# EAGLE board 3D-Druck-Platine (EAGLE 7.4.0)
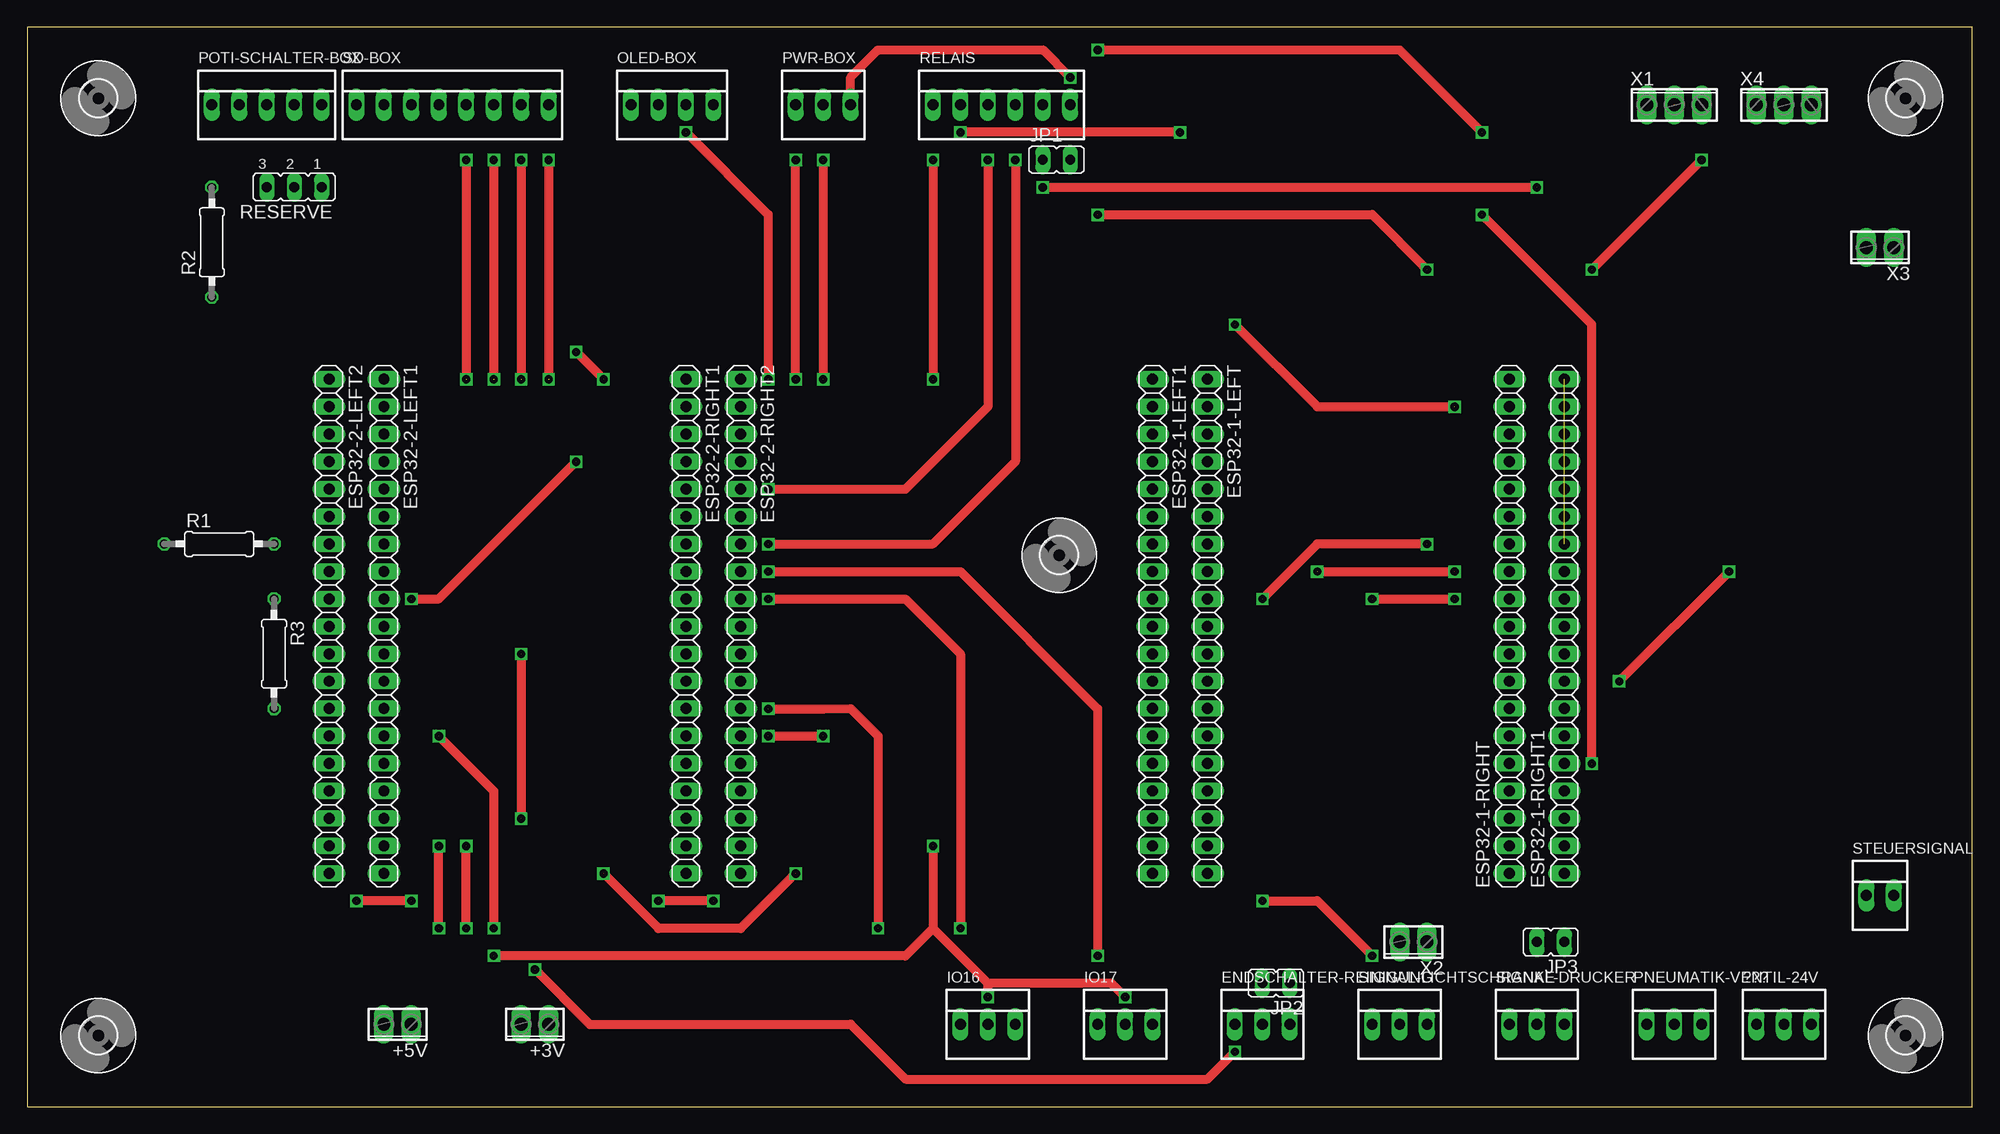
[diagram p0: board, top side]
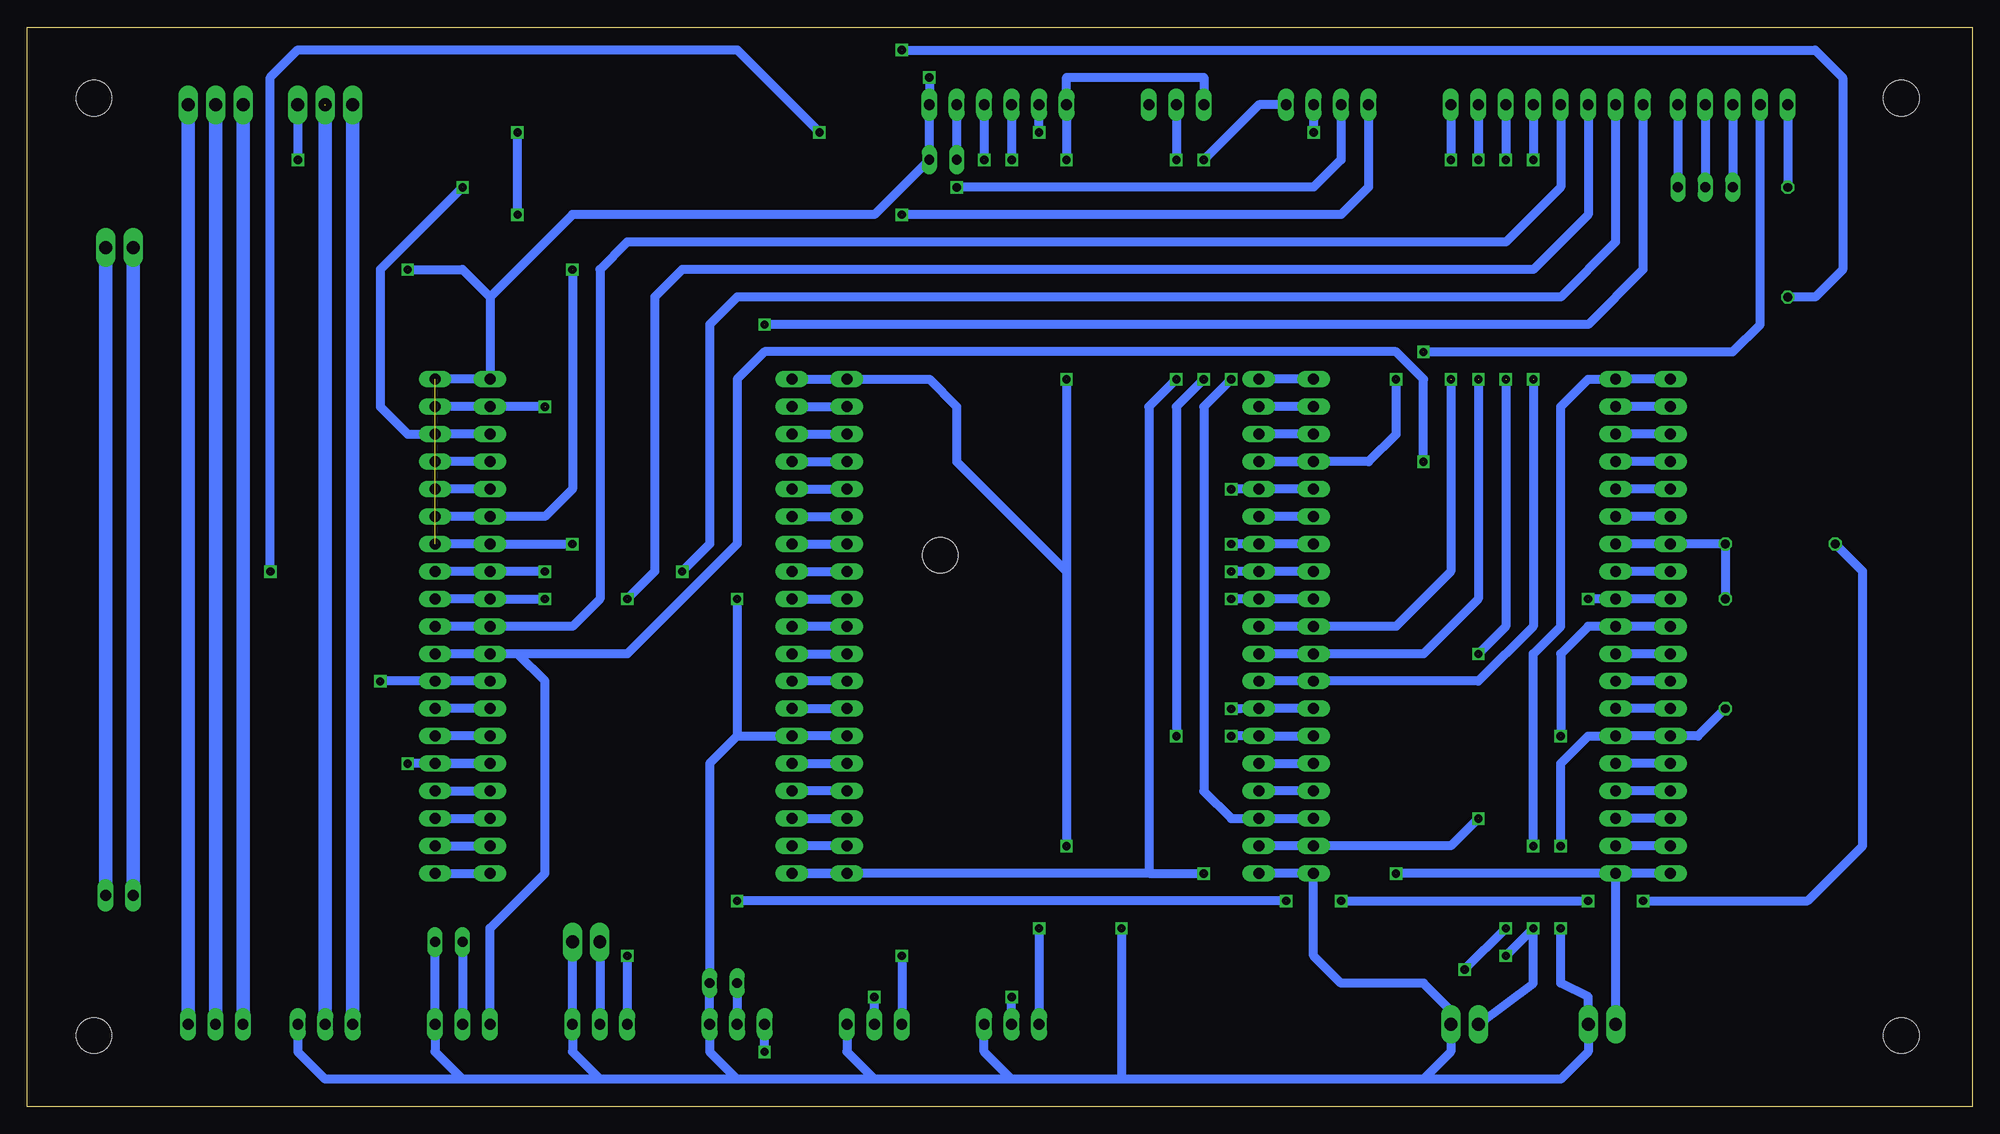
[diagram p1: board, bottom side, seen from below]

Size 180 x 99.92 mm. Coordinates in mm from the lower left corner, seen from the top.
Outline: 0,0 180,0 180,99.92 0,99.92 0,0
Copper layers 16: Bottom 0.035mm
Design rules "Multi-CB_1L_100µm-Tracks_OL35µm": minimum track width 0.1mm, minimum drill 0.2mm, track to track 0.1mm, track to pad 0.1mm, pad to pad 0.1mm, via to via 0.1mm, smd to smd 0mil, copper to edge 0.2mm, drill to drill 0.2mm, minimum pad ring 0.125mm, minimum via ring 0.1mm, stop-mask expansion 2mil, vias tented up to drill 0.45mm, thermal gap 0.2mm

## Footprints (pad centres in the part's own frame; a part is rotated, then mirrored left to right if it is on the bottom)
2POL254 = drill 1.2 long: 1 -1.27,0; 2 1.27,0
22-23-2031 = drill 1 long: 1 -2.54,0; 2 0,0; 3 2.54,0
1X19 = drill 1.016 long: 1 -22.86,0; 2 -20.32,0; 3 -17.78,0; 4 -15.24,0; 5 -12.7,0; 6 -10.16,0; 7 -7.62,0; 8 -5.08,0; 9 -2.54,0; 10 0,0; 11 2.54,0; 12 5.08,0; 13 7.62,0; 14 10.16,0; 15 12.7,0; 16 15.24,0; 17 17.78,0; 18 20.32,0; 19 22.86,0
JP1 = drill 0.914 long: 1 0,-1.27; 2 0,1.27
22-23-2041 = drill 1 long: 1 -3.81,0; 2 -1.27,0; 3 1.27,0; 4 3.81,0
22-23-2051 = drill 1 long: 1 -5.08,0; 2 -2.54,0; 3 0,0; 4 2.54,0; 5 5.08,0
0207/10 = drill 0.813 octagon: 1 -5.08,0; 2 5.08,0
22-23-2061 = drill 1 long: 1 -6.35,0; 2 -3.81,0; 3 -1.27,0; 4 1.27,0; 5 3.81,0; 6 6.35,0
JP2 = drill 0.914 long: 1 -2.54,0; 2 0,0; 3 2.54,0
22-23-2081 = drill 1 long: 1 -8.89,0; 2 -6.35,0; 3 -3.81,0; 4 -1.27,0; 5 1.27,0; 6 3.81,0; 7 6.35,0; 8 8.89,0
22-23-2021 = drill 1 long: 1 -1.27,0; 2 1.27,0
3,3 = hole 3.3: 0,0
3POL254 = drill 1.2 long: 1 -2.54,0; 2 0,0; 3 2.54,0

## Placement (x,y rotation side)
+3V  +3V  [2POL254]  46.99,7.64 180 top
+5V  +5V  [2POL254]  34.29,7.64 180 top
???  22-23-2031  [22-23-2031]  162.56,7.64 0 top
ENDSCHALTER-REINIGUNG  22-23-2031  [22-23-2031]  114.3,7.64 0 top
ESP32-1-LEFT  ES32-1-Left  [1X19]  109.22,44.47 270 top
ESP32-1-LEFT1  ES32-1-Left  [1X19]  104.14,44.47 270 top
ESP32-1-RIGHT  ESP32-1-Right  [1X19]  137.16,44.47 90 top
ESP32-1-RIGHT1  ESP32-1-Right  [1X19]  142.24,44.47 90 top
ESP32-2-LEFT1  ESP-2-Left  [1X19]  33.02,44.47 270 top
ESP32-2-LEFT2  ESP-2-Left  [1X19]  27.94,44.47 270 top
ESP32-2-RIGHT1  ESP32-2-Right  [1X19]  60.96,44.47 270 top
ESP32-2-RIGHT2  ESP32-2-Right  [1X19]  66.04,44.47 270 top
IO16  22-23-2031  [22-23-2031]  88.9,7.64 0 top
IO17  22-23-2031  [22-23-2031]  101.6,7.64 0 top
JP1  Reserve-Relais  [JP1]  95.25,87.65 270 top
JP2  Reserve Endschalter  [JP1]  115.57,11.45 90 top
JP3  Reserver-Drucker  [JP1]  140.97,15.26 90 top
OLED-BOX  22-23-2041  [22-23-2041]  59.69,92.73 0 top
PNEUMATIK-VENTIL-24V  22-23-2031  [22-23-2031]  152.4,7.64 0 top
POTI-SCHALTER-BOX  22-23-2051  [22-23-2051]  22.18,92.73 0 top
PWR-BOX  22-23-2031  [22-23-2031]  73.66,92.73 0 top
R1  1  [0207/10]  17.78,52.09 0 top
R2  100  [0207/10]  17.1,80.01 90 top
R3  1  [0207/10]  22.86,41.93 270 top
RELAIS  22-23-2061  [22-23-2061]  90.17,92.73 0 top
RESERVE  Reserve-Poti/Schalter  [JP2]  24.72,85.11 180 top
SD-BOX  22-23-2081  [22-23-2081]  39.37,92.73 0 top
SIGNAL-DRUCKER  22-23-2031  [22-23-2031]  139.7,7.64 0 top
SIGNAL-LICHTSCHRANKE  22-23-2031  [22-23-2031]  127,7.64 0 top
STEUERSIGNAL  22-23-2021  [22-23-2021]  171.45,19.57 0 top
U$1  [3,3]  6.6,6.6 0 top
U$2  [3,3]  6.6,93.33 0 top
U$3  [3,3]  173.8,93.33 0 top
U$4  [3,3]  173.8,6.6 0 top
U$5  [3,3]  95.5,51.05 0 top
X1  Pneumatik Ventil  [3POL254]  152.4,92.73 0 top
X2  Lichtschranke  [2POL254]  128.27,15.26 180 top
X3  Steuersignal  [2POL254]  171.45,79.53 180 top
X4  ??  [3POL254]  162.56,92.73 0 top

## Library data of the parts
+3V +5V X1-X4 = con-phoenix-254; OC_FARNELL: unknown; OC_NEWARK: unknown
??? ENDSCHALTER-REINIGUNG IO16 IO17 PNEUMATIK-VENTIL-24V PWR-BOX SIGNAL-DRUCKER SIGNAL-LICHTSCHRANKE = con-molex; MF: MOLEX; MPN: 22-23-2031; OC_FARNELL: 1462950; OC_NEWARK: 30C0862
ESP32-1-LEFT ESP32-1-LEFT1 ESP32-1-RIGHT ESP32-1-RIGHT1 ESP32-2-LEFT1 ESP32-2-LEFT2 ESP32-2-RIGHT1 ESP32-2-RIGHT2 = pinhead
JP1-JP3 RESERVE = jumper
OLED-BOX = con-molex; MF: MOLEX; MPN: 22-23-2041; OC_FARNELL: 1462920; OC_NEWARK: 38C0355
POTI-SCHALTER-BOX = con-molex; MF: MOLEX; MPN: 22-23-2051; OC_FARNELL: 1462952; OC_NEWARK: 38C9178
R1-R3 = rcl
RELAIS = con-molex; MF: MOLEX; MPN: 22-23-2061; OC_FARNELL: 1462922; OC_NEWARK: 27C1933
SD-BOX = con-molex; MF: MOLEX; MPN: 22-23-2081; OC_FARNELL: 1756826; OC_NEWARK: 01C7592
STEUERSIGNAL = con-molex; MF: MOLEX; MPN: 22-23-2021; OC_FARNELL: 1462926; OC_NEWARK: 25C3832
U$1-U$5 = holes

## Nets
GND: +3V.1 +5V.1 ENDSCHALTER-REINIGUNG.3 ESP32-1-LEFT1.14 ESP32-1-LEFT.14 ESP32-1-RIGHT1.13 ESP32-1-RIGHT1.19 ESP32-1-RIGHT.13 ESP32-1-RIGHT.19 ESP32-2-LEFT1.14 ESP32-2-LEFT2.14 ESP32-2-RIGHT1.13 ESP32-2-RIGHT1.19 ESP32-2-RIGHT2.13 ESP32-2-RIGHT2.19 IO16.3 IO17.3 JP1.2 JP2.1 JP3.1 PNEUMATIK-VENTIL-24V.3 PWR-BOX.3 R3.2 RELAIS.6 SIGNAL-DRUCKER.3 SIGNAL-LICHTSCHRANKE.3 X1.3 X2.1
N$1: ESP32-1-LEFT1.2 ESP32-1-LEFT.2
N$2: POTI-SCHALTER-BOX.3 RESERVE.3
N$3: ESP32-1-LEFT1.3 ESP32-1-LEFT.3
N$3V: +3V.2 ESP32-1-LEFT1.1 ESP32-1-LEFT.1 ESP32-2-LEFT1.1 ESP32-2-LEFT2.1 IO16.2 IO17.2 PWR-BOX.1 RELAIS.1
N$4: POTI-SCHALTER-BOX.4 RESERVE.2
N$5: POTI-SCHALTER-BOX.5 RESERVE.1
N$5V: +5V.2 ESP32-1-LEFT1.19 ESP32-1-LEFT.19 ESP32-2-LEFT1.19 ESP32-2-LEFT2.19 PWR-BOX.2
N$6: ESP32-1-LEFT1.4 ESP32-1-LEFT.4
N$7: ESP32-1-LEFT1.5 ESP32-1-LEFT.5
N$8: ENDSCHALTER-REINIGUNG.2 JP2.2
N$9: ESP32-1-LEFT1.6 ESP32-1-LEFT.6
N$10: JP3.2 SIGNAL-DRUCKER.2
N$11: R1.1 SIGNAL-LICHTSCHRANKE.1
N$12: SIGNAL-LICHTSCHRANKE.2 X2.2
N$13: PNEUMATIK-VENTIL-24V.1 X1.1
N$14: STEUERSIGNAL.1 X3.2
N$15: STEUERSIGNAL.2 X3.1
N$16: PNEUMATIK-VENTIL-24V.2 X1.2
N$17: ???.1 X4.1
N$18: ???.2 X4.2
N$19: ???.3 X4.3
N$20: JP1.1 RELAIS.5
N$21: ESP32-1-LEFT1.7 ESP32-1-LEFT.7
N$22: ESP32-1-LEFT1.8 ESP32-1-LEFT.8
N$23: ESP32-1-LEFT1.9 ESP32-1-LEFT.9
N$24: ESP32-1-LEFT1.10 ESP32-1-LEFT.10
N$25: ESP32-1-LEFT1.11 ESP32-1-LEFT.11
N$26: ESP32-1-LEFT1.12 ESP32-1-LEFT.12
N$27: ESP32-1-LEFT1.13 ESP32-1-LEFT.13
N$28: ESP32-1-LEFT1.15 ESP32-1-LEFT.15
N$29: ESP32-1-LEFT1.16 ESP32-1-LEFT.16
N$30: ESP32-1-LEFT1.17 ESP32-1-LEFT.17
N$31: ESP32-1-LEFT1.18 ESP32-1-LEFT.18
N$32: ESP32-1-RIGHT1.1 ESP32-1-RIGHT.1
N$33: ESP32-1-RIGHT1.2 ESP32-1-RIGHT.2
N$34: ESP32-1-RIGHT1.3 ESP32-1-RIGHT.3
N$35: ESP32-1-RIGHT1.4 ESP32-1-RIGHT.4
N$37: ESP32-1-RIGHT1.7 ESP32-1-RIGHT.7
N$38: ESP32-1-RIGHT1.15 ESP32-1-RIGHT.15
N$39: ESP32-1-RIGHT1.16 ESP32-1-RIGHT.16
N$40: ESP32-2-LEFT1.2 ESP32-2-LEFT2.2
N$41: ESP32-2-LEFT1.3 ESP32-2-LEFT2.3
N$42: ESP32-2-LEFT1.4 ESP32-2-LEFT2.4
N$43: ESP32-2-LEFT1.5 ESP32-2-LEFT2.5
N$44: ESP32-2-LEFT1.6 ESP32-2-LEFT2.6
N$45: ESP32-2-LEFT1.8 ESP32-2-LEFT2.8
N$46: ESP32-2-LEFT1.11 ESP32-2-LEFT2.11
N$47: ESP32-2-LEFT1.12 ESP32-2-LEFT2.12
N$48: ESP32-2-LEFT1.13 ESP32-2-LEFT2.13
N$49: ESP32-2-LEFT1.15 ESP32-2-LEFT2.15
N$50: ESP32-2-LEFT1.16 ESP32-2-LEFT2.16
N$51: ESP32-2-LEFT1.17 ESP32-2-LEFT2.17
N$52: ESP32-2-LEFT1.18 ESP32-2-LEFT2.18
N$53: ESP32-2-RIGHT1.1 ESP32-2-RIGHT2.1
N$54: ESP32-2-RIGHT1.2 ESP32-2-RIGHT2.2
N$55: ESP32-2-RIGHT1.3 ESP32-2-RIGHT2.3
N$57: ESP32-2-RIGHT1.6 ESP32-2-RIGHT2.6
N$58: ESP32-2-RIGHT1.15 ESP32-2-RIGHT2.15
N$59: POTI-SCHALTER-BOX.1 R2.2
N$60: ESP32-1-RIGHT1.6 ESP32-1-RIGHT.6
N$101: ESP32-2-RIGHT1.16 ESP32-2-RIGHT2.16
N$ESP1-18: ESP32-1-RIGHT1.11 ESP32-1-RIGHT.11 SD-BOX.3
N$ESP1-IO2: ESP32-1-RIGHT1.5 ESP32-1-RIGHT.5 R2.1
N$ESP1-IO5: ESP32-1-RIGHT1.10 ESP32-1-RIGHT.10 SD-BOX.4
N$ESP1-IO16: ESP32-1-RIGHT1.8 ESP32-1-RIGHT.8 RELAIS.2
N$ESP1-IO17_ESP2-IO25: ESP32-1-RIGHT1.9 ESP32-1-RIGHT.9 ESP32-2-LEFT1.9 ESP32-2-LEFT2.9 SIGNAL-DRUCKER.1
N$ESP1-IO19: ESP32-1-RIGHT1.12 ESP32-1-RIGHT.12 SD-BOX.2
N$ESP1-IO21: ESP32-1-RIGHT1.14 ESP32-1-RIGHT.14 OLED-BOX.1
N$ESP1-IO22: ESP32-1-RIGHT1.17 ESP32-1-RIGHT.17 OLED-BOX.2
N$ESP1-IO23: ESP32-1-RIGHT1.18 ESP32-1-RIGHT.18 SD-BOX.1
N$ESP2-IO2: ESP32-2-RIGHT1.5 ESP32-2-RIGHT2.5 RELAIS.3
N$ESP2-IO4: ESP32-2-RIGHT1.7 ESP32-2-RIGHT2.7 RELAIS.4
N$ESP2-IO5: ESP32-2-RIGHT1.10 ESP32-2-RIGHT2.10 SD-BOX.8
N$ESP2-IO15: ESP32-2-RIGHT1.4 ESP32-2-RIGHT2.4 POTI-SCHALTER-BOX.2
N$ESP2-IO16: ESP32-2-RIGHT1.8 ESP32-2-RIGHT2.8 IO17.1
N$ESP2-IO17: ESP32-2-RIGHT1.9 ESP32-2-RIGHT2.9 IO16.1
N$ESP2-IO18: ESP32-2-RIGHT1.11 ESP32-2-RIGHT2.11 SD-BOX.7
N$ESP2-IO19: ESP32-2-RIGHT1.12 ESP32-2-RIGHT2.12 SD-BOX.5
N$ESP2-IO21: ESP32-2-RIGHT1.14 ESP32-2-RIGHT2.14 OLED-BOX.4
N$ESP2-IO22: ESP32-2-RIGHT1.17 ESP32-2-RIGHT2.17 OLED-BOX.3
N$ESP2-IO23: ESP32-2-RIGHT1.18 ESP32-2-RIGHT2.18 SD-BOX.6
N$ESP2-IO26: ENDSCHALTER-REINIGUNG.1 ESP32-2-LEFT1.10 ESP32-2-LEFT2.10
N$ESP2-IO32: ESP32-2-LEFT1.7 ESP32-2-LEFT2.7 R1.2 R3.1

## Tracks (layer width: path | path; a pad name or v marks a point on that pad's centre or on a via)
GND  (14 unrouted)
  Top 0.813: 154.94,87.65 144.78,77.49 | 38.1,16.53 38.1,24.15 | 78.74,16.53 78.74,34.31 76.2,36.85 arc-2 68.58,36.83 | PWR-BOX.3 76.2,95.27 78.74,97.81 93.98,97.81 96.52,95.27 | 129.54,52.09 119.38,52.09 114.3,47.01
  Bottom 0.813: 137.16,74.95 ESP32-1-RIGHT.19 ESP32-1-RIGHT1.19 | JP3.1 SIGNAL-DRUCKER.3 142.24,5.1 139.7,2.56 | X1.3 154.94,87.65 | PNEUMATIK-VENTIL-24V.3 154.94,5.1 152.4,2.56 139.7,2.56 | X2.1 SIGNAL-LICHTSCHRANKE.3 129.54,5.1 127,2.56 | 50.8,2.56 48.26,5.1 +3V.1 48.26,8.89 50.8,11.43 50.8,11.45 58.42,11.45 60.96,13.99 ESP32-2-RIGHT1.19 ESP32-2-RIGHT2.19 | 50.8,2.56 78.74,2.56 | 88.9,2.56 101.6,2.56 | 101.6,2.56 114.3,2.56 | 114.3,2.56 127,2.56 | 127,2.56 139.7,2.56 | 50.8,2.56 38.1,2.56 35.56,5.1 +5V.1 35.56,10.18 38.1,11.45 38.1,16.53 | 114.3,34.31 116.84,31.77 JP2.1 ENDSCHALTER-REINIGUNG.3 116.84,5.1 114.3,2.56 | 114.3,34.31 ESP32-1-LEFT.14 ESP32-1-LEFT1.14 | R3.2 25.4,34.31 ESP32-2-LEFT2.14 ESP32-2-LEFT1.14 35.56,34.31 38.1,31.77 38.1,24.15 | 78.74,16.53 78.74,2.56 | 96.52,95.27 RELAIS.6 JP1.2 101.6,82.57 129.54,82.57 137.16,74.95 | 144.78,77.49 139.7,77.49 137.16,74.95 | IO17.3 104.14,5.1 101.6,2.56 | 78.74,2.56 88.9,2.56 | 88.9,2.56 91.44,5.1 IO16.3 | ESP32-1-RIGHT1.13 ESP32-1-RIGHT.13 129.54,52.09 | 114.3,47.01 114.3,34.31 | ESP32-2-RIGHT1.13 ESP32-2-RIGHT2.13 arc-1 68.58,36.83
N$1
  Bottom 0.813: ESP32-1-LEFT.2 ESP32-1-LEFT1.2
N$2
  Bottom 0.813: POTI-SCHALTER-BOX.3 RESERVE.3
N$3
  Bottom 0.813: ESP32-1-LEFT.3 ESP32-1-LEFT1.3 104.14,62.23
N$3V  (13 unrouted)
  Top 0.813: 83.82,87.65 83.82,67.33 | 40.64,16.53 40.64,24.15 | 83.82,24.15 83.82,16.53 | 88.9,10.16 88.9,11.43 | 88.9,11.43 88.9,11.45 83.82,16.53 | 101.6,10.18 101.58,10.18 100.33,11.43 88.9,11.43 | 83.82,16.53 83.82,16.51 81.28,13.97 43.2,13.97 43.18,13.99
  Bottom 0.813: PWR-BOX.1 71.12,95.27 83.82,95.27 RELAIS.1 83.82,87.65 | +3V.2 40.64,11.45 40.64,16.53 43.18,13.99 | 40.64,24.15 40.64,41.93 38.1,44.47 38.1,64.79 35.56,67.33 ESP32-2-LEFT1.1 ESP32-2-LEFT2.1 | 83.82,49.55 93.98,59.71 93.98,64.79 96.52,67.33 ESP32-1-LEFT1.1 ESP32-1-LEFT.1 | 83.82,49.55 83.82,24.15 | 83.82,67.33 83.82,49.55 | IO16.2 88.9,10.18 | IO17.2 101.6,10.18
N$4
  Bottom 0.813: POTI-SCHALTER-BOX.4 RESERVE.2
N$5
  Bottom 0.813: POTI-SCHALTER-BOX.5 RESERVE.1
N$5V  (6 unrouted)
  Top 0.813: 73.66,87.65 73.66,67.33 | 53.34,21.61 58.42,16.53 58.42,16.51 66.04,16.51 71.12,21.59
  Bottom 0.813: PWR-BOX.2 73.66,87.65 | 76.2,21.61 ESP32-1-LEFT.19 ESP32-1-LEFT1.19 104.14,21.59 | ESP32-2-LEFT1.19 +5V.2 | ESP32-2-LEFT1.19 53.34,21.61 | 73.66,67.33 76.2,64.79 76.2,21.61 | ESP32-2-LEFT2.19 ESP32-2-LEFT1.19 | 76.2,21.61 71.14,21.61 71.12,21.59
N$6
  Bottom 0.813: ESP32-1-LEFT.4 ESP32-1-LEFT1.4 104.14,59.69
N$7
  Bottom 0.813: ESP32-1-LEFT.5 ESP32-1-LEFT1.5
N$8
  Bottom 0.813: JP2.2 ENDSCHALTER-REINIGUNG.2
N$9
  Bottom 0.813: ESP32-1-LEFT.6 ESP32-1-LEFT1.6
N$10
  Bottom 0.813: JP3.2 SIGNAL-DRUCKER.2
N$11  (6 unrouted)
  Top 0.813: 63.5,19.07 58.42,19.07 | 35.56,19.07 30.48,19.07 | 114.3,19.07 119.38,19.07 124.46,13.99
  Bottom 0.813: 58.42,19.07 35.56,19.07 | 30.48,19.07 15.24,19.07 10.16,24.15 10.16,49.55 R1.1 | 63.5,19.07 114.3,19.07 | 124.46,13.99 SIGNAL-LICHTSCHRANKE.1
N$12
  Bottom 0.813: X2.2 SIGNAL-LICHTSCHRANKE.2
N$13
  Bottom 1.27: X1.1 PNEUMATIK-VENTIL-24V.1
N$14
  Bottom 1.27: X3.2 STEUERSIGNAL.1
N$15
  Bottom 1.27: X3.1 STEUERSIGNAL.2
N$16  (1 unrouted)
  Bottom 1.27: PNEUMATIK-VENTIL-24V.2 152.4,92.71
N$17
  Bottom 1.27: X4.1 ???.1
N$18
  Bottom 1.27: ???.2 X4.2
N$19
  Bottom 1.27: X4.3 ???.3
N$20
  Bottom 0.813: RELAIS.5 JP1.1
N$21
  Bottom 0.813: ESP32-1-LEFT.7 ESP32-1-LEFT1.7
N$22
  Bottom 0.813: ESP32-1-LEFT.8 ESP32-1-LEFT1.8 104.14,49.53
N$23
  Bottom 0.813: ESP32-1-LEFT.9 ESP32-1-LEFT1.9
N$24
  Bottom 0.813: ESP32-1-LEFT1.10 ESP32-1-LEFT.10
N$25
  Bottom 0.813: ESP32-1-LEFT.11 ESP32-1-LEFT1.11 104.14,41.91
N$26
  Bottom 0.813: ESP32-1-LEFT1.12 ESP32-1-LEFT.12
N$27
  Bottom 0.813: ESP32-1-LEFT.13 ESP32-1-LEFT1.13
N$28
  Bottom 0.813: ESP32-1-LEFT.15 ESP32-1-LEFT1.15 104.14,31.75
N$29
  Bottom 0.813: ESP32-1-LEFT1.16 ESP32-1-LEFT.16
N$30
  Bottom 0.813: ESP32-1-LEFT.17 ESP32-1-LEFT1.17 104.14,26.67
N$31
  Bottom 0.813: ESP32-1-LEFT1.18 ESP32-1-LEFT.18
N$32
  Bottom 0.813: ESP32-1-RIGHT1.1 ESP32-1-RIGHT.1
N$33
  Bottom 0.813: ESP32-1-RIGHT1.2 ESP32-1-RIGHT.2
N$34
  Bottom 0.813: ESP32-1-RIGHT1.3 ESP32-1-RIGHT.3
N$35
  Bottom 0.813: ESP32-1-RIGHT1.4 ESP32-1-RIGHT.4
N$37
  Bottom 0.813: ESP32-1-RIGHT.7 ESP32-1-RIGHT1.7
N$38
  Bottom 0.813: ESP32-1-RIGHT.15 ESP32-1-RIGHT1.15
N$39
  Bottom 0.813: ESP32-1-RIGHT.16 ESP32-1-RIGHT1.16
N$40
  Bottom 0.813: ESP32-2-LEFT2.2 ESP32-2-LEFT1.2
N$41
  Bottom 0.813: ESP32-2-LEFT2.3 ESP32-2-LEFT1.3
N$42
  Bottom 0.813: ESP32-2-LEFT2.4 ESP32-2-LEFT1.4
N$43
  Bottom 0.813: ESP32-2-LEFT2.5 ESP32-2-LEFT1.5
N$44
  Bottom 0.813: ESP32-2-LEFT2.6 ESP32-2-LEFT1.6
N$45
  Bottom 0.813: ESP32-2-LEFT2.8 ESP32-2-LEFT1.8
N$46
  Bottom 0.813: ESP32-2-LEFT2.11 ESP32-2-LEFT1.11
N$47
  Bottom 0.813: ESP32-2-LEFT2.12 ESP32-2-LEFT1.12
N$48
  Bottom 0.813: ESP32-2-LEFT2.13 ESP32-2-LEFT1.13
N$49
  Bottom 0.813: ESP32-2-LEFT2.15 ESP32-2-LEFT1.15
N$50
  Bottom 0.813: ESP32-2-LEFT2.16 ESP32-2-LEFT1.16
N$51
  Bottom 0.813: ESP32-2-LEFT2.17 ESP32-2-LEFT1.17
N$52
  Bottom 0.813: ESP32-2-LEFT2.18 ESP32-2-LEFT1.18
N$53
  Bottom 0.813: ESP32-2-RIGHT1.1 ESP32-2-RIGHT2.1
N$54
  Bottom 0.813: ESP32-2-RIGHT1.2 ESP32-2-RIGHT2.2
N$55
  Bottom 0.813: ESP32-2-RIGHT1.3 ESP32-2-RIGHT2.3
N$57
  Bottom 0.813: ESP32-2-RIGHT1.6 ESP32-2-RIGHT2.6
N$58
  Bottom 0.813: ESP32-2-RIGHT2.15 ESP32-2-RIGHT1.15
N$59
  Bottom 0.813: POTI-SCHALTER-BOX.1 R2.2
N$60
  Bottom 0.813: ESP32-1-RIGHT.6 ESP32-1-RIGHT1.6
N$67  (via drill 0.76)
  other vias: 93.98,85.09
N$68  (1 unrouted)
N$74  (1 unrouted)
N$75  (1 unrouted)
N$76  (1 unrouted)
N$77  (1 unrouted)
N$78  (1 unrouted)
N$79  (1 unrouted)
N$100  (1 unrouted)
N$101
  Bottom 0.813: ESP32-2-RIGHT1.16 ESP32-2-RIGHT2.16
N$ESP1-18  (3 unrouted)
  Top 0.813: 124.46,47.01 132.08,47.01
  Bottom 0.813: SD-BOX.3 35.56,82.57 40.64,77.49 119.38,77.49 121.92,74.95 121.92,49.55 124.46,47.01 | ESP32-1-RIGHT1.11 ESP32-1-RIGHT.11 132.08,47.01
N$ESP1-IO2  (4 unrouted)
  Top 0.813: 144.78,31.75 144.78,72.39 134.62,82.55 | 134.62,90.17 127,97.79 99.06,97.79
  Bottom 0.813: 144.78,31.75 144.76,31.77 ESP32-1-RIGHT1.5 142.22,31.75 | 134.62,82.55 134.62,90.17 | 99.06,97.79 14.56,97.79 12.02,95.25 12.02,77.47 14.56,74.93 R2.1 | ESP32-1-RIGHT.5 142.22,31.77 142.24,31.75 142.22,31.75 | 137.16,31.75 142.22,31.75
N$ESP1-IO5
  Bottom 0.813: SD-BOX.4 38.1,85.11 43.18,80.03 124.46,80.03 127,77.49 127,47.01 129.54,44.47 ESP32-1-RIGHT.10 ESP32-1-RIGHT1.10
N$ESP1-IO16  (4 unrouted)
  Top 0.813: 147.32,39.39 157.48,49.55 | 106.68,90.19 86.36,90.19
  Bottom 0.813: ESP32-1-RIGHT1.8 ESP32-1-RIGHT.8 147.32,39.39 | 157.48,49.55 157.48,95.27 154.94,97.81 114.3,97.81 106.68,90.19 | 86.36,90.19 RELAIS.2
N$ESP1-IO17_ESP2-IO25  (2 unrouted)
  Top 0.813: 35.56,47.01 38.1,47.01 50.8,59.71
  Bottom 0.813: 134.62,41.93 124.46,41.93 114.3,52.09 114.3,67.33 111.76,69.87 53.34,69.87 50.8,67.33 50.8,59.71 | 134.62,41.93 ESP32-1-RIGHT.9 ESP32-1-RIGHT1.9 | 35.56,47.01 ESP32-2-LEFT1.9 ESP32-2-LEFT2.9 | SIGNAL-DRUCKER.1 137.16,16.53 132.08,21.61 132.08,39.39 134.62,41.93
N$ESP1-IO19  (2 unrouted)
  Top 0.813: 119.38,49.55 132.08,49.55
  Bottom 0.813: SD-BOX.2 33.02,80.03 38.1,74.95 114.3,74.95 116.84,72.41 116.84,52.09 119.38,49.55 | 132.08,49.55 ESP32-1-RIGHT.12 ESP32-1-RIGHT1.12
N$ESP1-IO21  (4 unrouted)
  Top 0.813: 99.06,82.57 124.46,82.57 129.54,77.49
  Bottom 0.813: OLED-BOX.1 55.88,85.11 58.42,82.57 99.06,82.57 | 129.54,77.49 129.54,57.17 132.08,54.63 ESP32-1-RIGHT.14 ESP32-1-RIGHT1.14
N$ESP1-IO22  (via drill 0.6)  (1 unrouted)
  Top 0.813: v93.98,85.11 139.7,85.11
  Bottom 0.813: OLED-BOX.2 58.42,87.65 60.96,85.11 v93.98,85.11 | ESP32-1-RIGHT.17 ESP32-1-RIGHT1.17 144.78,62.25 147.32,64.79 147.32,77.49 139.7,85.11
N$ESP1-IO23  (2 unrouted)
  Top 0.813: 111.76,72.41 119.38,64.79 132.08,64.79
  Bottom 0.813: SD-BOX.1 30.48,77.49 35.56,72.41 111.76,72.41 | 132.08,64.79 ESP32-1-RIGHT.18 ESP32-1-RIGHT1.18
N$ESP2-IO2  (4 unrouted)
  Top 0.813: 68.58,57.17 81.28,57.17 88.9,64.79 88.9,87.65
  Bottom 0.813: ESP32-2-RIGHT1.5 ESP32-2-RIGHT2.5 68.58,57.17 | RELAIS.3 88.9,87.65
N$ESP2-IO4  (4 unrouted)
  Top 0.813: 68.58,52.09 83.82,52.09 91.44,59.71 91.44,87.65
  Bottom 0.813: ESP32-2-RIGHT1.7 ESP32-2-RIGHT2.7 68.58,52.09 | RELAIS.4 91.44,87.65
N$ESP2-IO5  (via drill 0.76)  (4 unrouted)
  Top 0.813: 48.26,87.65 v48.26,87.63 48.26,67.33
  Bottom 0.813: SD-BOX.8 48.26,87.65 | 48.26,67.33 48.26,49.55 53.34,44.47 ESP32-2-RIGHT1.10 ESP32-2-RIGHT2.10
N$ESP2-IO15  (via drill 0.76)  (2 unrouted)
  Top 0.813: 53.34,67.33 50.8,69.87
  Bottom 0.813: 53.34,67.33 v53.34,67.31 53.34,62.23 55.88,59.69 60.96,59.69 | 50.8,69.87 22.18,69.87 19.64,72.41 POTI-SCHALTER-BOX.2 | 60.96,59.69 66.04,59.69 ESP32-2-RIGHT2.4 ESP32-2-RIGHT1.4 60.96,59.69
  other vias: 50.8,69.85 48.26,67.31 45.72,67.31 43.18,67.31 40.64,67.31 60.96,90.17 71.12,87.63 73.66,87.63 83.82,87.63 86.36,90.17 88.9,87.63 91.44,87.63 99.06,97.79 96.52,95.25 106.68,90.17 99.06,82.55 129.54,77.47 134.62,82.55 134.62,90.17 139.7,85.09 144.78,77.47 154.94,87.63 157.48,49.53 147.32,39.37 144.78,31.75 124.46,13.97 114.3,19.05 111.76,5.08 101.6,10.16 99.06,13.97 88.9,10.16 86.36,16.51 78.74,16.51 83.82,24.13 71.12,21.59 63.5,19.05 58.42,19.05 53.34,21.59 46.99,12.7 43.18,13.97 43.18,16.51 40.64,16.51 38.1,16.51 35.56,19.05 30.48,19.05 38.1,24.13 40.64,24.13 45.72,26.67 38.1,34.29 45.72,41.91 35.56,46.99 50.8,59.69 68.58,52.07 68.58,57.15 68.58,49.53 68.58,46.99 68.58,67.31 71.12,67.31 73.66,67.31 83.82,67.31 111.76,72.39 132.08,64.77 129.54,52.07 132.08,49.53 132.08,46.99 124.46,46.99 119.38,49.53 114.3,46.99 68.58,36.83 68.58,34.29 73.66,34.29
N$ESP2-IO16  (4 unrouted)
  Top 0.813: 68.58,49.53 86.36,49.53 99.06,36.83 99.06,13.97
  Bottom 0.813: ESP32-2-RIGHT1.8 ESP32-2-RIGHT2.8 68.58,49.53 | 99.06,13.97 IO17.1
N$ESP2-IO17  (4 unrouted)
  Top 0.813: 68.58,46.99 81.28,46.99 86.36,41.91 86.36,16.51
  Bottom 0.813: 68.58,46.99 ESP32-2-RIGHT2.9 ESP32-2-RIGHT1.9 | 86.36,16.51 IO16.1
N$ESP2-IO18  (via drill 0.76)  (4 unrouted)
  Top 0.813: 45.72,87.65 v45.72,87.63 45.72,67.33
  Bottom 0.813: SD-BOX.7 45.72,87.65 | 45.72,67.33 45.72,47.01 50.8,41.93 ESP32-2-RIGHT1.11 ESP32-2-RIGHT2.11
N$ESP2-IO19  (via drill 0.76)  (4 unrouted)
  Top 0.813: 40.64,87.65 v40.64,87.63 40.64,67.33
  Bottom 0.813: SD-BOX.5 40.64,87.65 | 40.64,67.33 40.64,44.47 45.72,39.39 ESP32-2-RIGHT1.12 ESP32-2-RIGHT2.12
N$ESP2-IO21  (6 unrouted)
  Top 0.813: 71.12,67.33 71.12,87.65 | 68.58,34.31 73.66,34.31
  Bottom 0.813: ESP32-2-RIGHT1.14 ESP32-2-RIGHT2.14 68.58,34.31 | OLED-BOX.4 66.04,92.73 71.12,87.65 | 71.12,67.33 73.66,64.79 73.66,34.31
N$ESP2-IO22  (2 unrouted)
  Top 0.813: 60.96,90.19 68.58,82.57 68.58,67.33
  Bottom 0.813: ESP32-2-RIGHT1.17 ESP32-2-RIGHT2.17 66.06,26.67 68.58,26.67 71.12,29.21 71.12,64.79 68.58,67.33 | OLED-BOX.3 60.96,90.19
N$ESP2-IO23  (via drill 0.76)  (8 unrouted)
  Top 0.813: 43.18,87.65 v43.18,87.63 43.18,67.33 | 45.72,41.93 45.72,26.69
  Bottom 0.813: SD-BOX.6 43.18,87.65 | 43.18,67.33 43.18,44.47 45.72,41.93 | 45.72,26.69 48.26,24.15 ESP32-2-RIGHT1.18 ESP32-2-RIGHT2.18
N$ESP2-IO26  (4 unrouted)
  Top 0.813: 38.1,34.31 43.18,29.23 43.18,16.53 | 111.76,5.1 109.22,2.56 81.28,2.56 76.2,7.64 76.18,7.62 52.07,7.62 46.99,12.7
  Bottom 0.813: 38.1,34.31 38.1,41.93 35.56,44.47 ESP32-2-LEFT1.10 ESP32-2-LEFT2.10 | 111.76,5.1 ENDSCHALTER-REINIGUNG.1 | 43.18,16.53 43.18,16.51 46.99,12.7
N$ESP2-IO32
  Bottom 0.813: R3.1 R1.2 ESP32-2-LEFT2.7 ESP32-2-LEFT1.7